# EAGLE board xio (EAGLE 5.01)
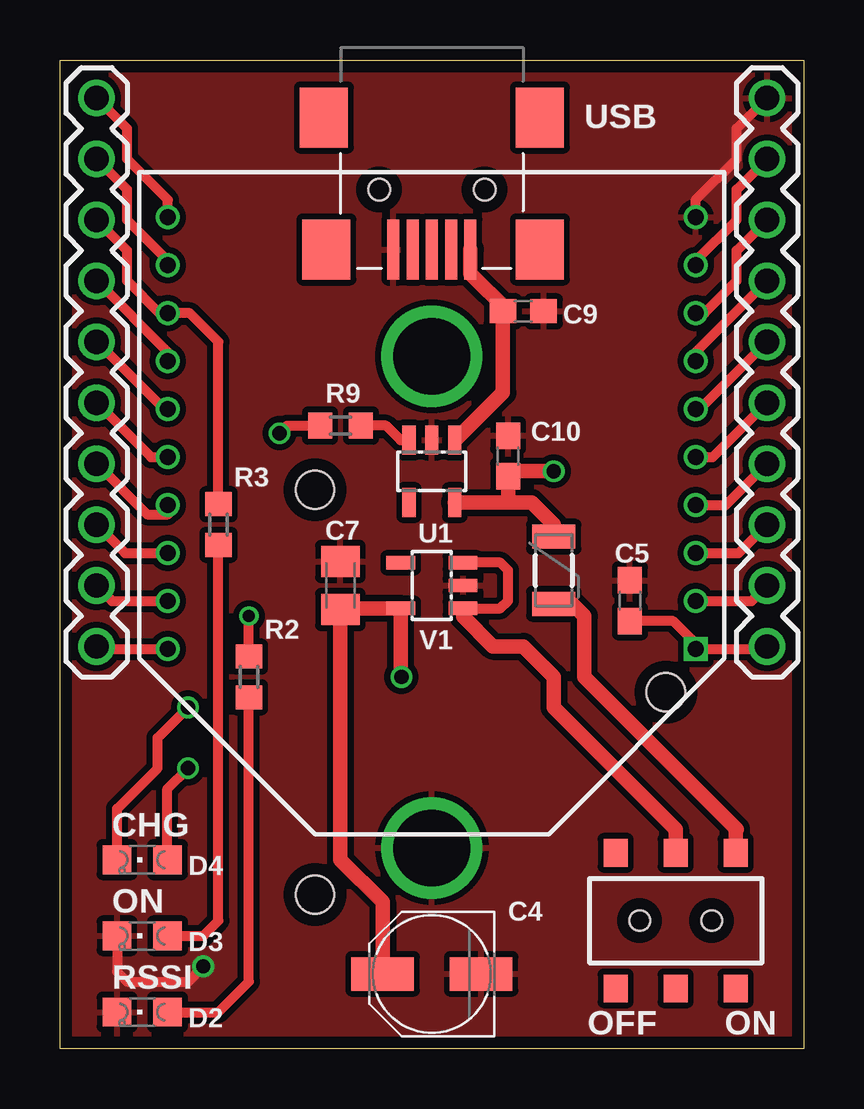
[diagram p0: board, top side]
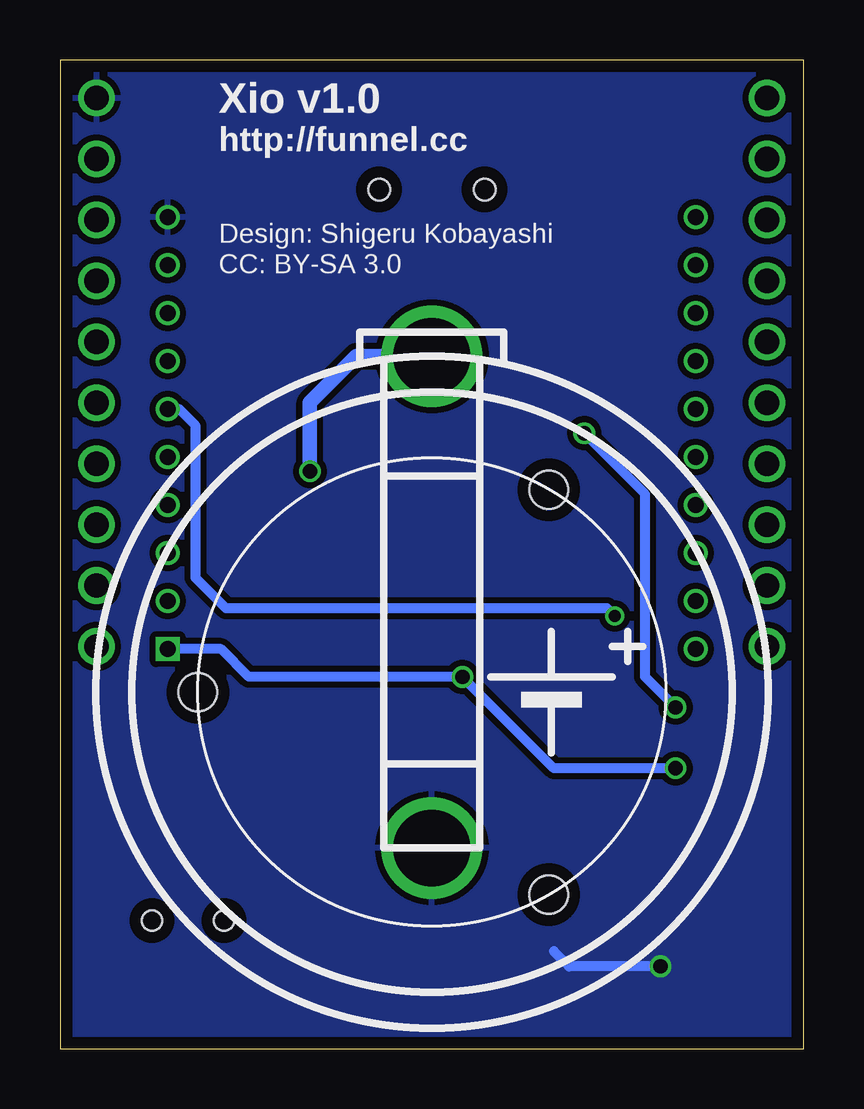
[diagram p1: board, bottom side, seen from below]

Size 30.99 x 41.21 mm. Coordinates in mm from the lower left corner, seen from the top.
Outline: 30.99,41.21 30.99,0 0,0 0,41.21 30.99,41.21
Copper layers (1*16): Top 0.035mm / dielectric 1.5mm / Bottom 0.035mm
Design rules "p_ban_2layer *": minimum track width 5mil, minimum drill 0.3mm, track to track 5mil, track to pad 5mil, pad to pad 5mil, via to via 5mil, smd to smd 5mil, copper to edge 0.5mm, drill to drill 0.3mm, minimum pad ring 0.15mm, minimum via ring 0.15mm, stop-mask expansion 4mil, vias tented up to drill 0.35mm, thermal gap 10mil
Net classes: 0 Default: width 0.203 mm; 1 VCC: width 0.381 mm; 2 LEDPower: width 0.203 mm; 3 ButtonSignal: width 0.203 mm

## Footprints (pad centres in the part's own frame; a part is rotated, then mirrored left to right if it is on the bottom)
BH1000S = drill 3.2 round: + 0,-14; - 0,6.5 | hole 1.6: 9.75,0; -4.87,8.44; -4.87,-8.44
PANASONIC_C = smd 2.6 x 1.4: + 2.05,0; - -2.05,0
0603 = smd 1.1 x 1: 1 -0.85,0; 2 0.85,0
C0805K = smd 1.3 x 1.6: 1 -1,0; 2 1,0
CHIPLED_0805 = smd 1.2 x 1.2: A 0,-1.05; C 0,1.05
PTC-1206 = smd 1 x 1.8: 1 -1.4,0; 2 1.4,0
1X10 = drill 1.016 round: 1 0,0; 2 2.54,0; 3 5.08,0; 4 7.62,0; 5 10.16,0; 6 12.7,0; 7 15.24,0; 8 17.78,0; 9 20.32,0; 10 22.86,0
XBEE = drill 0.66 square: 1 -11,9 | drill 0.66 round: 2 -11,7; 3 -11,5; 4 -11,3; 5 -11,1; 6 -11,-1; 7 -11,-3; 8 -11,-5; 9 -11,-7; 10 -11,-9; 11 11,-9; 12 11,-7; 13 11,-5; 14 11,-3; 15 11,-1; 16 11,1; 17 11,3; 18 11,5; 19 11,7; 20 11,9
R0603 = smd 1 x 1.1: 1 -0.85,0; 2 0.85,0
AYZ0202 = smd 1 x 1.15: 1 -2.5,2.825; 2 0,2.825; 3 2.5,2.825; 4 -2.5,-2.825; 5 0,-2.825; 6 2.5,-2.825 | hole 0.85: 1.5,0; -1.5,0
SOT23-5 = smd 0.55 x 1.2: 1 -0.95,-1.3; 2 0,-1.3; 3 0.95,-1.3; 4 0.95,1.3; 5 -0.95,1.3
USB-MINIB = smd 2.5 x 0.5: D+ 2.5,0; D- 2.5,0.8; GND 2.5,-1.6; ID 2.5,-0.8; VBUS 2.5,1.6 | smd 2.5 x 2: P$1 -3,-4.5; P$2 -3,4.5; P$3 2.5,-4.4; P$4 2.5,4.5 | hole 0.9: 0,2.2; 0,-2.2

## Placement (x,y rotation side)
BAT1  [BH1000S]  15.49,14.86 180 bottom
C4  10u  [PANASONIC_C]  15.49,3.11 180 top
C5  0.1uF  [0603]  23.75,18.67 90 top
C7  10µ  [C0805K]  11.68,19.3 90 top
C9  1.0uF  [0603]  19.3,30.73 0 top
C10  1.0uF  [0603]  18.67,24.7 90 top
D2  Green  [CHIPLED_0805]  3.43,1.52 90 top
D3  Red  [CHIPLED_0805]  3.43,4.7 90 top
D4  Orange  [CHIPLED_0805]  3.43,7.87 90 top
F1  500mA  [PTC-1206]  20.57,19.94 270 top
JP1  M100.1  [1X10]  29.46,16.76 90 top
JP2  M100.1  [1X10]  1.52,16.76 90 top
M1  XBEE  [XBEE]  15.49,25.65 180 top
R2  1k  [R0603]  7.87,15.49 90 top
R3  1k  [R0603]  6.6,21.84 90 top
R9  1k  [R0603]  11.68,25.97 180 top
SW1  AYZ0202  [AYZ0202]  25.65,5.33 0 top
U1  MAX1555  [SOT23-5]  15.49,24.07 180 top
V1  MIC5205-3.3  [SOT23-5]  15.49,19.3 90 top
X1  USBSMD  [USB-MINIB]  15.49,35.81 270 top

## Library data of the parts
BAT1 = memory_protection_devices
C4 C7 R2 R3 R9 = rcl
C5 C9 C10 F1 JP1 JP2 SW1 U1 V1 X1 = SparkFun
D2-D4 = led
M1 = digi_xbee

## Nets
DIN: JP1.3 M1.3
DO8: JP1.4 M1.4
DOUT: JP1.2 M1.2
DTR: JP1.9 M1.9
GND: BAT1.- C4.- C5.2 C7.2 C9.2 C10.2 D2.C D3.C JP1.10 M1.10 U1.2 V1.2 X1.GND
N$1: JP2.8 M1.13 R3.2
N$2: JP2.1 M1.20
N$3: D2.A R2.1
N$5: SW1.2 V1.1 V1.3
N$6: D3.A R3.1
N$7: JP2.2 M1.19
N$8: D4.C R9.2
N$9: F1.2 SW1.3
N$10: JP2.3 M1.18
N$11: R9.1 U1.3
N$12: JP2.4 M1.17
N$13: JP2.5 M1.16
N$14: JP2.6 M1.15
N$15: JP2.7 M1.14
N$16: JP2.9 M1.12
N$17: JP2.10 M1.11
PWM0: JP1.6 M1.6 R2.2
PWM1: JP1.7 M1.7
RESERVED: JP1.8 M1.8
RESET#: JP1.5 M1.5
USB_VIN: C9.1 U1.1 X1.VBUS
VBATT: BAT1.+ C10.1 F1.1 U1.5
VCC [VCC]: C4.+ C5.1 C7.1 D4.A JP1.1 M1.1 V1.5

## Tracks (layer width: path | path; a pad name or v marks a point on that pad's centre or on a via)
DIN
  Top 0.406: M1.3 28.27,20.65 JP1.3
DO8
  Top 0.406: M1.4 27.73,22.65 JP1.4
DOUT
  Top 0.406: M1.2 28.81,18.65 JP1.2
DTR
  Top 0.406: M1.9 26.49,32.84 28.19,34.54 28.19,35.81 JP1.9
GND  (via drill 0.6)
  Top 0.406: M1.10 26.49,35.38 28.19,37.08 28.19,38.35 JP1.10 | D3.C 2.38,3.21 2.79,2.79 5.33,2.79 v5.97,3.43
  Bottom 0.406: v5.97,3.43 9.78,3.43 10.41,4.06
  pour Top (isolate 0.254): -1.02,42.16 32,42.16 32,-1.02 -1.02,-1.02
  pour Bottom (isolate 0.254): 0.25,43.43 30.73,43.43 30.73,-2.29 0.25,-2.29
N$1
  Top 0.406: R3.2 6.6,29.46 5.41,30.65 M1.13 4.14,30.65 2.79,32 2.79,33.27 JP2.8
N$2
  Top 0.406: M1.20 1.63,16.65 JP2.1
N$3
  Top 0.406: D2.A 6.6,1.52 7.87,2.79 R2.1
N$5
  Top 0.406: SW1.2 25.37,8.16 | V1.1 18.35,18.35 18.67,18.67 18.67,19.94 18.35,20.25 V1.3
  Top 0.61: V1.1 16.79,18 18.03,16.76 19.3,16.76 20.57,15.49 20.57,14.22 25.65,9.14 SW1.2 25.65,7.87
N$6
  Top 0.406: D3.A 5.97,4.7 6.6,5.33 R3.1
N$7
  Top 0.406: M1.19 2.17,18.65 JP2.2
N$8  (via drill 0.6)
  Top 0.406: D4.C 2.38,10 4.06,11.68 4.06,12.95 v5.33,14.22 | R9.2 9.46,25.97 v9.14,25.65
  Bottom 0.406: v5.33,14.22 6.6,15.49 6.6,23.11 v9.14,25.65
N$9
  Top 0.406: 28.15,9.1 28.19,9.14 | 21.34,18.54 F1.2
  Top 0.61: SW1.3 28.15,9.1 | 21.34,18.54 21.84,18.03 21.84,15.49 28.19,9.14
N$10
  Top 0.406: M1.18 2.71,20.65 JP2.3
N$11
  Top 0.406: U1.3 14.19,25.37 13.59,25.97 R9.1
N$12
  Top 0.406: M1.17 4.49,22.27 3.63,22.27 JP2.4
N$13
  Top 0.406: M1.16 3.79,24.65 JP2.5
N$14
  Top 0.406: M1.15 4.33,26.65 JP2.6
N$15
  Top 0.406: M1.14 4.49,29.03 JP2.7
N$16
  Top 0.406: M1.12 4.49,32.84 2.79,34.54 2.79,35.81 JP2.9
N$17
  Top 0.406: M1.11 4.49,35.38 2.79,37.08 2.79,38.35 JP2.10
PWM0  (via drill 0.5)
  Top 0.406: R2.2 v7.87,18.03 | M1.6 26.65,26.65 JP1.6
  Bottom 0.406: M1.6 26.02,26.65 25.34,25.97 25.34,19.62 24.07,18.35 8.19,18.35 v7.87,18.03
PWM1
  Top 0.406: M1.7 26.49,29.03 JP1.7
RESERVED
  Top 0.406: M1.8 26.84,30.65 28.19,32 28.19,33.27 JP1.8
RESET#
  Top 0.406: M1.5 27.19,24.65 JP1.5
USB_VIN
  Top 0.406: C9.1 18.67,30.73 | U1.1 16.48,25.37
  Top 0.61: X1.VBUS 17.09,32.31 18.67,30.73 | C9.1 18.45,27.34 16.48,25.37
VBATT  (via drill 0.6)
  Top 0.61: U1.5 18.67,22.77 | 18.67,22.77 C10.1 18.67,24.07 v20.57,24.07 | F1.1 20.57,21.84 19.65,22.77 18.67,22.77
  Bottom 0.61: v20.57,24.07 20.57,26.61 20.57,26.92 18.64,28.86 BAT1.+
VCC  (via drill 0.6)
  Top 0.406: C7.1 11.68,18.67 12,18.35 | v14.22,15.49 14.19,15.52 | D4.A 4.48,10.83 v5.33,11.68 | M1.1 29.35,16.65 JP1.1 | C5.1 25.55,17.82 26.61,16.76
  Top 0.61: 12,18.35 V1.5 14.19,15.52 | C7.1 11.68,9.14 | 11.68,9.14 11.68,8.83 | 26.61,16.76 M1.1 | C4.+ 13.44,6.11 11.68,7.87 11.68,9.14
  Bottom 0.406: v5.33,11.68 10.41,11.68 v14.22,15.49 23.11,15.49 24.27,16.65 M1.1

## Text on the board
tPlace: USB | CHG | ON | RSSI | OFF | ON
bPlace: Xio v1.0 | http://funnel.cc | Design: Shigeru Kobayashi | CC: BY-SA 3.0